# Altium PCB PCB3.PcbDoc
Units mm, origin at the board's own origin, x right, y up, seen from the top; angles counter-clockwise.
Board outline 127 x 76.71 mm, 2 copper layers (Top Layer, Bottom Layer); 30 components, 21 nets, 76 pads, 11 vias.
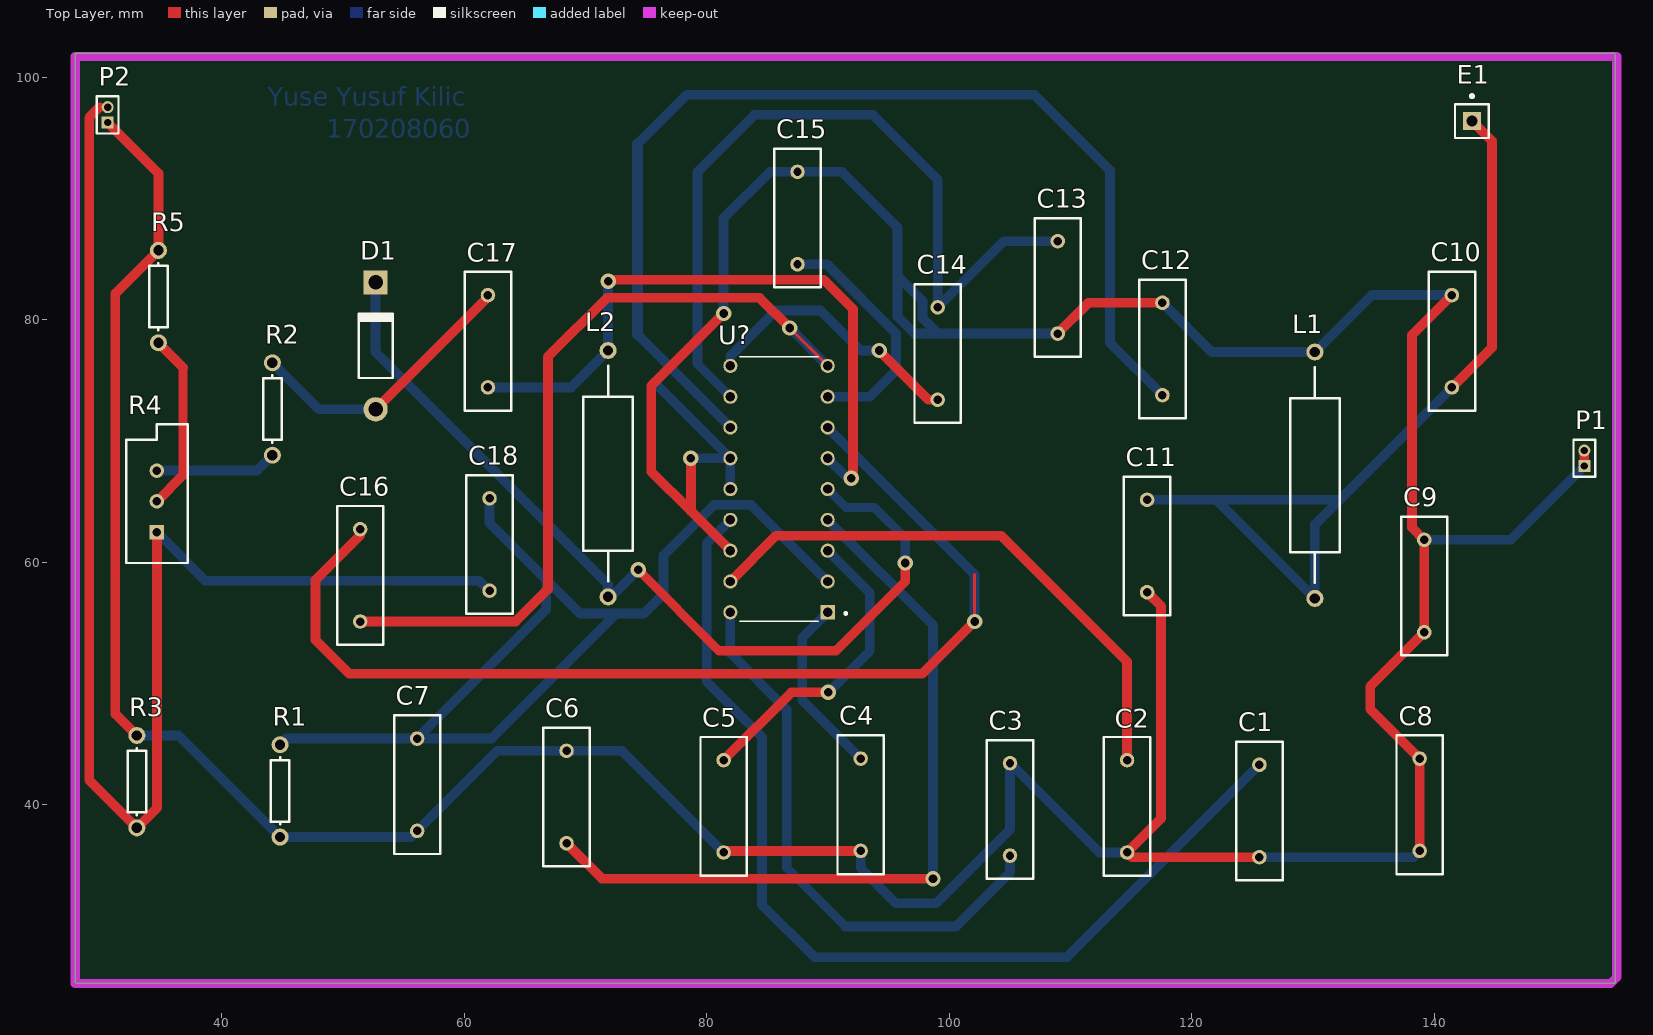
[diagram p0: Top Layer view]
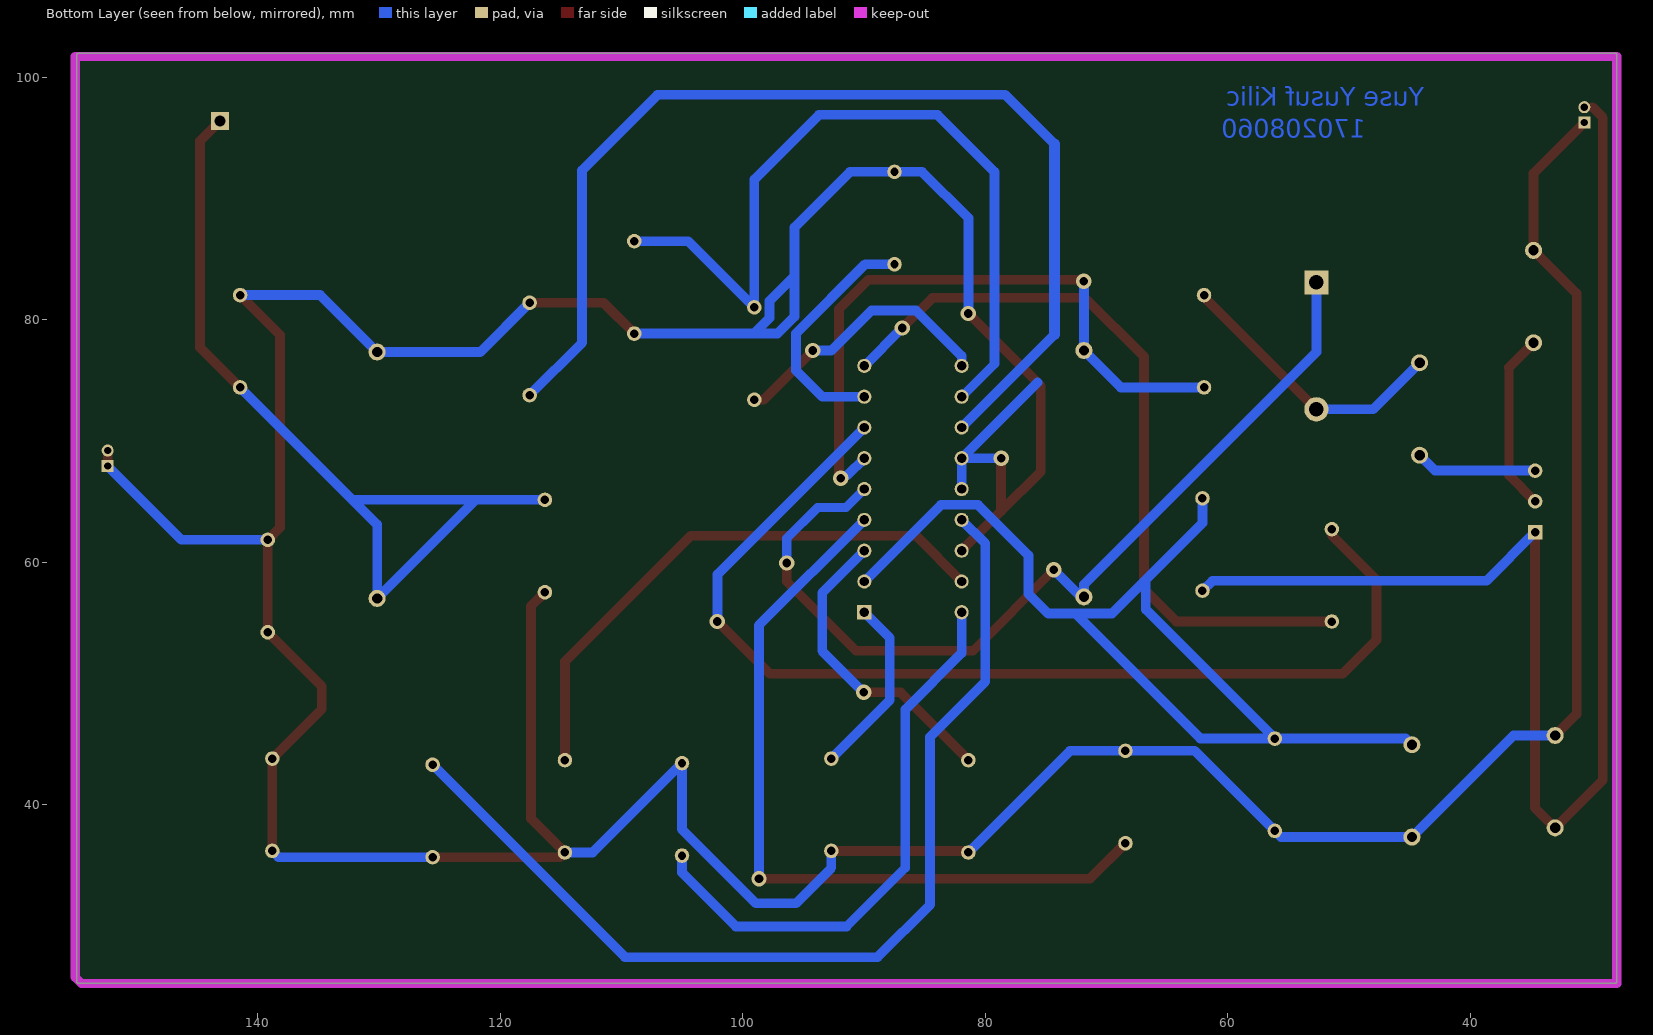
[diagram p1: Bottom Layer view, seen from below]

## Layer stack, top to bottom
Top Solder: solder mask 0.0102, Solder Resist, Dk 3.5
Top Layer: signal copper 0.0356
Dielectric 1: dielectric 0.32, FR-4, Dk 4.8
Bottom Layer: signal copper 0.0356
Bottom Solder: solder mask 0.0102, Solder Resist, Dk 3.5

## Board outline
27.94,25.4 ccw(c28.067,25.4) 28.067,25.273 154.813,25.273 ccw(c154.813,25.4) 154.94,25.4 154.94,101.854 ccw(c154.813,101.854) 154.813,101.981 28.067,101.981 ccw(c28.067,101.854) 27.94,101.854

## Design rules (kind name [scope] priority, off if disabled: settings)
Clearance [All] p1: gap=0.254 ignorepadtopadclearanceinfootprint=FALSE except(0: Arc-Hole Track-Hole SMDPad-Hole THPad-Hole Via-Hole Fill-Hole Poly-Hole Region-Hole Text-Hole)
PolygonConnect [All] p1: connectstyle=Relief reliefconductorwidth=0.254 reliefentries=4 polygonreliefangle="90 Angle" airgapwidth=0.254
RoutingVias [All] p1: holewidth=0.711 width=1.27 viastyle="Through Hole" minholewidth=0.711 minwidth=1.27 maxholewidth=0.711 maxwidth=1.27
SolderMaskExpansion [All] p1: expansion=0.102
Width [All] p1: maxlimit=2 minlimit=0.254 preferedwidth=0.75 minimp=50.000000 maximp=50.000000 favimp=50.000000
30 further rules are at their usual default settings.

## Components (designator, comment, footprint, x,y, rotation, side; value= is the part's Value field where it differs from the comment)
C1 "Cap" RAD-0.3 125.603,39.497 r90 top value=0.1mF
C2 "Cap" RAD-0.3 114.681,39.878 r90 top value=330pF
C3 "Cap" RAD-0.3 105.029,39.624 r270 top value=220pF
C4 "Cap" RAD-0.3 92.71,40.005 r90 top value=0.1mF
C5 "Cap" RAD-0.3 81.407,39.878 r90 top value=22nF
C6 "Cap" RAD-0.3 68.453,40.64 r270 top value=10nF
C7 "Cap" RAD-0.3 56.134,41.656 r90 top value=1nF
C8 "Cap" RAD-0.3 138.811,40.005 r90 top value=4.7nF
C9 "Cap" RAD-0.3 139.192,58.039 r90 top value=4.7nF
C10 "Cap" RAD-0.3 141.478,78.232 r270 top value=47pF
C11 "Cap" RAD-0.3 116.332,61.341 r90 top value=39pF
C12 "Cap" RAD-0.3 117.602,77.597 r90 top value=150pF
C13 "Cap" RAD-0.3 108.966,82.677 r90 top value=3.3nF
C14 "Cap" RAD-0.3 99.06,77.216 r90 top value=330pF
C15 "Cap" RAD-0.3 87.503,88.392 r90 top value=180pF
C16 "Cap" RAD-0.3 51.435,58.928 r90 top value=3.3nF
C17 "Cap" RAD-0.3 61.976,78.232 r90 top value=100pF
C18 "Cap" RAD-0.3 62.103,61.468 r90 top value=2.2mF
D1 "Diode 1N4007" DO-41 52.705,77.851 r90 top
E1 "Antenna" PIN1 143.129,96.393 r0 top
L1 "Inductor Adj" AXIAL-0.8 130.175,67.183 r90 top value=5mH
L2 "Inductor Adj" AXIAL-0.8 71.882,67.31 r270 top value=5mH
P1 "MHDR1X2" MHDR1X2 152.4,67.945 r90 top
P2 "MHDR1X2" MHDR1X2 30.607,96.266 r90 top
R1 "27K" AXIAL-0.3 44.831,41.148 r90 top value=1K
R2 "Res1" AXIAL-0.3 44.196,72.644 r90 top value=5.6K
R3 "Res1" AXIAL-0.3 33.02,41.91 r270 top value=5.6k
R4 "RPot" VR5 34.671,65.024 r90 top value=10k
R5 "Res1" AXIAL-0.3 34.798,81.915 r90 top value=5.6K
U? "TDA7000" *DIP802W45P254L2180H470Q18 85.979,66.04 r180 top

## Footprints (in the part's own frame and the unit in brackets; to place one, negate y for a bottom-side part, rotate by r counter-clockwise, add the part's x,y. Pads: shape width x height; smd on the part's side, far side on the other; paste and mask are expansions set on the pad)
*DIP802W45P254L2180H470Q18 [mm]
  rect 1.17x1.17 hole 0.77: 1(-4.012,10.16)
  round 1.17 hole 0.77: 2(-4.012,7.62) 3(-4.012,5.08) 4(-4.012,2.54) 5(-4.012,0) 6(-4.012,-2.54) 7(-4.012,-5.08) 8(-4.012,-7.62) 9(-4.012,-10.16) 10(4.012,-10.16) 11(4.012,-7.62) 12(4.012,-5.08) 13(4.012,-2.54) 14(4.012,0) 15(4.012,2.54) 16(4.012,5.08) 17(4.012,7.62) 18(4.012,10.16)
  silkscreen extent -5.6,-10.9 3.24,10.9
AXIAL-0.3 [mm] "Axial Device, Thru-Hole; 2 Leads; 0.3 in Pin Spacing"
  round 1.4 hole 0.85: 1(-3.81,0) 2(3.81,0)
  silkscreen extent -2.77,-0.76 2.77,0.76
AXIAL-0.8 [mm] "Axial Device, Thru-Hole; 2 Leads; 0.8 in Pin Spacing"
  round 1.4 hole 0.85: 1(-10.16,0) 2(10.16,0)
  silkscreen extent -8.89,-2.03 8.89,2.03
DO-41 [mm] "Diode, Axial; Body 5.2 x 2.7 mm (LxDia. max), Lead Dia. 0.86 mm (max)"
  round 2 hole 1.2: 1(-5.23,0)
  rect 2x2 hole 1.2: 2(5.23,0)
  silkscreen extent -2.65,-1.4 2.75,1.4
MHDR1X2 [mm] "Connector; Header; 2 Position"
  rect 1x1 hole 0.6: 1(0,0)
  round 1 hole 0.6: 2(1.27,0)
  silkscreen extent -0.9,-0.9 2.17,0.9
PIN1 [mm] "Generic Antenna; 1 Lead"
  rect 1.5x1.5 hole 0.9: 1(0,0)
  silkscreen extent -1.4,-1.4 1.4,2.17
RAD-0.3 [mm] "Radial Cap, Thru-Hole; 2 Leads; 0.3 in Pin Spacing"
  round 1.2 hole 0.7: 1(-3.81,0) 2(3.81,0)
  silkscreen extent -5.71,-1.91 5.71,1.91
VR5 [mm] "Thru-Hole; 3 Leads"
  rect 1.2x1.2 hole 0.7: 1(-2.54,0)
  round 1.2 hole 0.7: 2(0,0) 3(2.54,0)
  silkscreen extent -5.08,-2.54 6.35,2.54

## Part data
C1 C2 C3 C4 C5 C6 C7 C8 C9 C10 C11 C12 C13 C14 C15 C16 C17 C18: "Capacitor", LatestRevisionDate=17-Jul-2002, LatestRevisionNote="Re-released for DXP Platform.", PackageDescription="Radial Cap, Thru-Hole; 2 Leads; 0.3 in Pin Spacing", PackageReference=RAD-0.3, Published=8-Jun-2000, Publisher="Altium Limited"
D1: "1 Amp General Purpose Rectifier", Code_JEDEC=DO-204-AL, ComponentLink1Description="Manufacturer Link", ComponentLink1URL=http://www.fairchildsemi.com/, ComponentLink2Description=Datasheet, ComponentLink2URL=http://www.fairchildsemi.com/ds/1N%2F1N4001.pdf, DatasheetVersion=1998, LatestRevisionDate=17-Jul-2002, LatestRevisionNote="Re-released for DXP Platform.", PackageDescription="Diode, Axial; Body 5.2 x 2.7 mm (LxDia. max), Lead Dia. 0.86 mm (max)", PackageReference=DO-41, PackageVersion=Aug-1999, Published=8-Jun-2000, Publisher="Altium Limited"
E1: "Generic Antenna", LatestRevisionDate=17-Jul-2002, LatestRevisionNote="Re-released for DXP Platform.", PackageReference=PIN1, Published=24-Mar-1999, Publisher="Altium Limited"
L1 L2: "Adjustable Inductor", LatestRevisionDate=17-Jul-2002, LatestRevisionNote="Re-released for DXP Platform.", PackageDescription="Axial Device, Thru-Hole; 2 Leads; 0.8 in Pin Spacing", PackageReference=AXIAL-0.8, Published=24-Mar-1999, Publisher="Altium Limited", Set Position=0.5
P1 P2: "Header, 2-Pin", LatestRevisionDate=17-Jul-2002, LatestRevisionNote="Re-released for DXP Platform.", Publisher="Altium Limited"
R1: library part Res1, "Resistor", LatestRevisionDate=17-Jul-2002, LatestRevisionNote="Re-released for DXP Platform.", PackageDescription="Axial Device, Thru-Hole; 2 Leads; 0.3 in Pin Spacing", PackageReference=AXIAL-0.3, Published=8-Jun-2000, Publisher="Altium Limited"
R2 R3 R5: "Resistor", LatestRevisionDate=17-Jul-2002, LatestRevisionNote="Re-released for DXP Platform.", PackageDescription="Axial Device, Thru-Hole; 2 Leads; 0.3 in Pin Spacing", PackageReference=AXIAL-0.3, Published=8-Jun-2000, Publisher="Altium Limited"
R4: "Potentiometer", LatestRevisionDate=17-Jul-2002, LatestRevisionNote="Re-released for DXP Platform.", PackageDescription="Variable Resistor, Thru-Hole; 3 Leads", PackageReference=VR5, Published=8-Jun-2000, Publisher="Altium Limited", Set Position=0.5, Sim Note="Enter the Resistance value and the set point into parameter fields."

## Via types
v1: diameter 1.27, hole 0.711, Top Layer to Bottom Layer, 11 vias

## Nets (pads, with @x,y where several pads share a name; then routed paths per layer and width w, separated by ;. In a path a pad name is that pad's centre, name@x,y a point inside that pad or via, vN(x,y) a via of type N, cw(c..) or ccw(c..) an arc to the next point about the centre after c; other vN are vias at no path point)
GND: C1.1 C2.1 C3.1 C4.1 C5.1 C6.1 C7.1 C8.1 C8.2 C9.1 C9.2 C10.1 C11.1 C12.2 C13.1 C15.2 L1.2 P1.1 P1.2 P2.1 R1.1 R3.1 R5.2 U?.13 U?.14 U?.16 | length 409.4
  Top Layer w0.254: C5.1 C5.1@81.534,36.195
  Top Layer w0.8: P2.1 34.798,92.075 R5.2 31.242,82.169 31.242,47.498 R3.1 ; v1(78.712,68.58) 78.712,64.214 ; v1(81.407,80.518) 75.438,74.549 75.438,67.489 78.712,64.214 ; C5.1@81.534,36.195 C4.1 ; U?.16 78.712,64.214 ; C13.1 111.506,81.407 C12.2 ; C11.1 117.475,56.388 117.475,38.862 C2.1 115.062,35.687 C1.1 ; C8.1 C8.2 134.747,47.879 134.747,49.784 C9.1 C9.2 138.176,62.865 138.176,78.74 C10.1 ; P1.1 P1.2
  Bottom Layer w0.8: R3.1 36.449,45.72 R1.1 55.626,37.338 C7.1 62.738,44.45 C6.1 73.025,44.45 C5.1 ; 75.718,74.829 U?.13 ; v1(78.712,68.58) U?.13 ; v1(81.407,80.518) 81.407,88.392 85.217,92.202 C15.2 91.186,92.202 95.758,87.63 95.758,83.593 ; U?.14 U?.13 ; C4.1 92.71,34.798 95.631,31.877 98.933,31.877 105.029,37.973 C3.1 112.395,36.068 C2.1 ; C13.1 99.085,78.867 ; C12.2 121.666,77.343 L1.2 134.874,82.042 C10.1 ; C1.1 138.303,35.687 C8.1 ; C9.2 146.304,61.849 P1.1 ; 95.758,83.593 95.758,80.264 97.155,78.867 99.085,78.867 ; 95.758,83.593 97.806,81.545 97.806,80.146 99.085,78.867
NetC1_2: C1.2 U?.15 | length 83.8
  Bottom Layer w0.8: U?.15 80.01,61.543 80.01,50.165 84.582,45.593 84.582,31.75 88.9,27.432 109.728,27.432 C1.2
NetC2_2: C2.2 U?.17 | length 46.7
  Top Layer w0.8: U?.17 85.746,62.199 104.298,62.199 114.681,51.816 C2.2
NetC3_2: C3.2 U?.18 | length 46.7
  Bottom Layer w0.75: 86.614,34.798 91.44,29.972
  Bottom Layer w0.8: U?.18 81.967,52.526 86.614,47.879 86.614,34.798 ; 91.44,29.972 100.584,29.972 105.029,34.417 C3.2
NetC4_2: C4.2 U?.1 | length 14.9
  Bottom Layer w0.8: U?.1 87.884,53.773 87.884,48.641 C4.2
NetC5_2: C5.2 U?.3 | length 25.5
  Top Layer w0.8: C5.2 86.995,49.276 v1(90.043,49.276)
  Bottom Layer w0.8: U?.3 93.472,57.479 93.472,52.705 v1(90.043,49.276)
NetC6_2: C6.2 U?.4 | length 64.6
  Top Layer w0.8: C6.2 71.374,33.909 v1(98.679,33.909)
  Bottom Layer w0.8: U?.4 98.679,54.812 v1(98.679,33.909)
NetC7_2: C7.2 C18.2 R1.2 U?.2 | length 91
  Bottom Layer w0.254: R1.2 45.339,45.466
  Bottom Layer w0.8: 45.339,45.466 C7.2 ; C18.2 62.103,63.246 66.777,58.572 ; U?.2 83.672,64.739 80.614,64.739 76.454,60.579 76.454,57.404 74.828,55.778 72.592,55.778 ; C7.2 66.777,56.109 66.777,58.572 ; C7.2 62.28,45.466 72.592,55.778 ; 66.777,58.572 69.571,55.778 72.592,55.778
NetC10_2: C10.2 C11.2 E1.1 L1.1 | length 73.5
  Top Layer w0.8: C10.2 144.78,77.724 144.78,94.742 E1.1
  Bottom Layer w0.8: C11.2 122.047,65.151 ; C10.2 132.207,65.151 ; 122.047,65.151 L1.1 130.175,63.119 132.207,65.151 ; 122.047,65.151 132.207,65.151
NetC12_1: C12.1 U?.12 | length 90.1
  Bottom Layer w0.8: 74.295,78.792 U?.12 ; 74.295,94.488 78.359,98.552 107.061,98.552 113.284,92.329 113.284,78.105 C12.1
  Bottom Layer w0.9: 74.295,78.792 74.295,94.488
NetC13_2: C13.2 C14.2 U?.11 | length 66.3
  Bottom Layer w0.75: 79.248,76.379 U?.11
  Bottom Layer w0.8: 79.248,76.379 79.248,92.202 83.947,96.901 93.726,96.901 99.06,91.567 C14.2 104.521,86.487 C13.2
NetC14_1: C14.1 U?.10 | length 22.5
  Top Layer w0.8: v1(94.234,77.47) 98.298,73.406 C14.1
  Bottom Layer w0.8: U?.10 81.967,77.014 85.725,80.772 89.408,80.772 92.71,77.47 v1(94.234,77.47)
NetC15_1: C15.1 U?.8 | length 20.1
  Bottom Layer w0.8: C15.1 89.916,84.582 95.631,78.867 95.631,75.819 93.472,73.66 U?.8
NetC16_1: C16.1 U?.9 | length 67.6
  Top Layer w0.254: v1(86.868,79.323) U?.9
  Top Layer w0.8: C16.1 64.262,55.118 66.929,57.785 66.929,76.962 71.774,81.807 84.384,81.807 v1(86.868,79.323)
  Bottom Layer w0.8: v1(86.868,79.323) U?.9
NetC16_2: C16.2 U?.7 | length 92.9
  Top Layer w0.254: C16.2@51.435,62.23 C16.2 ; v1(102.108,55.118) 102.108,59.003
  Top Layer w0.8: C16.2@51.435,62.23 47.752,58.547 47.752,53.594 50.546,50.8 97.79,50.8 v1(102.108,55.118)
  Bottom Layer w0.8: U?.7 102.108,59.003 v1(102.108,55.118)
NetC17_1: C17.1 L2.1 U?.6 | length 55.8
  Top Layer w0.254: v1(71.882,83.185) 72.136,83.185 v1@72.263,83.312
  Top Layer w0.8: v1@72.263,83.312 89.662,83.312 92.075,80.899 v1@92.075,67.183
  Bottom Layer w0.254: v1@92.075,67.183 91.388,67.183 91.769,66.802 92.15,67.183 v1@92.329,67.183
  Bottom Layer w0.8: C17.1 68.834,74.422 L2.1 v1(71.882,83.185) ; U?.6 v1@91.388,67.183
  other v1: 91.948,66.929
NetC17_2: C17.2 D1.1 R2.2 | length 23.4
  Top Layer w0.254: C17.2@61.976,81.892 C17.2
  Top Layer w0.8: D1.1 C17.2@61.976,81.892
  Bottom Layer w0.8: R2.2 48.029,72.621 D1.1
NetC18_1: C18.1 P2.2 R3.2 R4.1 | length 116.6
  Top Layer w0.254: 29.972,97.536 P2.2
  Top Layer w0.8: 29.972,97.536 29.952,97.536 29.083,96.667 29.083,42.037 R3.2 34.671,39.751 R4.1
  Bottom Layer w0.8: R4.1 38.684,58.471 61.29,58.471 C18.1
NetD1_2: D1.2 L2.2 U?.5 | length 75.8
  Top Layer w0.75: v1(74.358,59.372) 81.026,52.705 90.678,52.705 96.393,58.42 v1@96.393,59.69
  Bottom Layer w0.254: L2.2 L2.2@72.136,57.15
  Bottom Layer w0.75: U?.5 91.515,64.516 93.853,64.516 96.393,61.976 v1(96.393,59.944)
  Bottom Layer w0.8: D1.2 52.705,77.343 71.882,58.166 L2.2 ; L2.2@72.136,57.15 v1(74.358,59.372)
NetR2_1: R2.1 R4.3 | length 10.1
  Bottom Layer w0.8: R4.3 42.926,67.564 R2.1
NetR4_2: R4.2 R5.1 | length 14.8
  Top Layer w0.75: 36.83,67.183 36.83,76.073
  Top Layer w0.8: R4.2 36.83,67.183 ; R5.1 36.83,76.073

## Keep-outs
Keep-Out Layer:
  lines w0.254: 28.067,25.4 28.067,101.854 154.813,101.854 154.813,25.4 28.067,25.4
  lines w0.75: 27.94,25.273 154.559,25.273 155.067,25.781 155.067,101.727 27.94,101.727 27.94,25.273

## Other copper
Bottom Layer:
  text "Yuse Yusuf Kilic" at 43.815,97.663 h1.52
  text "170208060" at 48.641,94.996 h1.52